# EAGLE board Week2ATTINY4-5-9-10 (EAGLE 8.4.3)
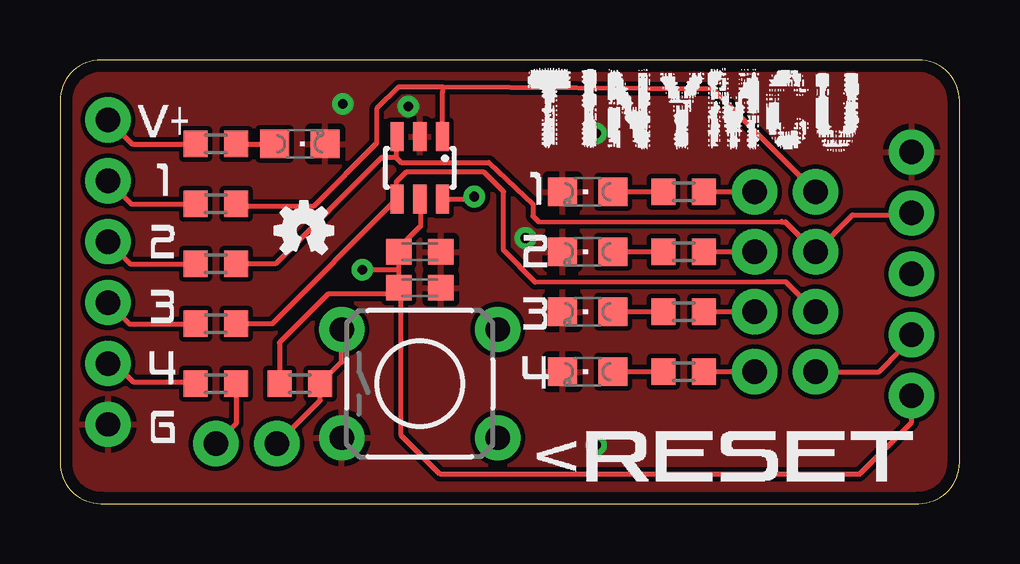
[diagram p0: board, top side]
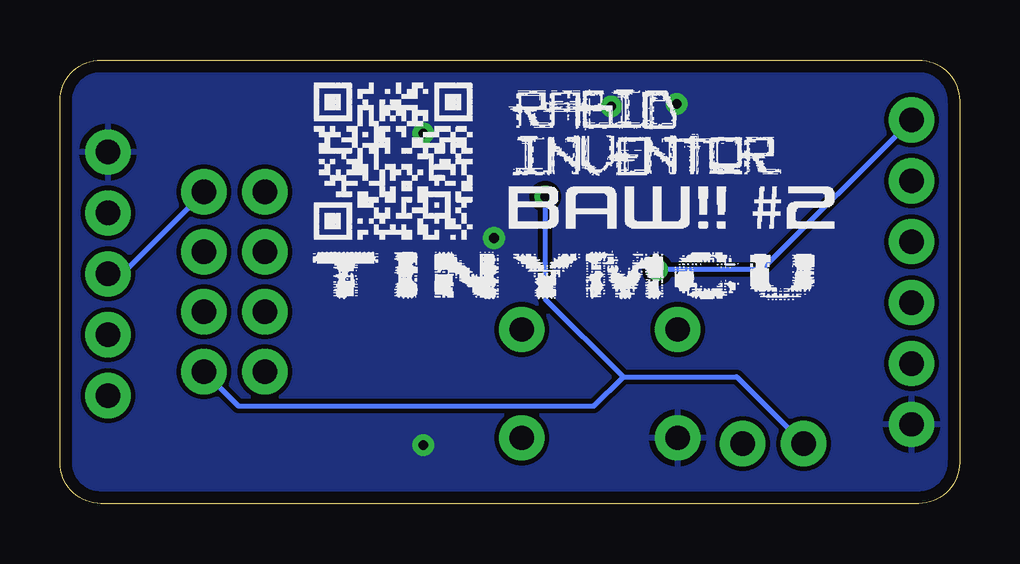
[diagram p1: board, bottom side, seen from below]

Size 37.5 x 18.5 mm. Coordinates in mm from the lower left corner, seen from the top.
Outline: 0,16.79 0,1.71 arc90 1.71,0 35.79,0 arc90 37.5,1.71 37.5,16.79 arc90 35.79,18.5 1.71,18.5 arc90 0,16.79
Copper layers (1*16): Top 0.035mm / dielectric 1.5mm / Bottom 0.035mm
Design rules "pimoroni": minimum track width 0.2mm, minimum drill 0.3mm, track to track 0.2mm, track to pad 0.2mm, pad to pad 0.2mm, via to via 0.2mm, smd to smd 0.15mm, copper to edge 0.5mm, drill to drill 0.15mm, minimum pad ring 0.3mm, minimum via ring 0.25mm, stop-mask expansion 0.05mm, vias tented up to drill 0.6mm, thermal gap 0.25mm

## Footprints (pad centres in the part's own frame; a part is rotated, then mirrored left to right if it is on the bottom)
C0603K = smd 1.05 x 1.08: 1 -0.875,0; 2 0.875,0
1X02_NO_SILK = drill 1.016 pad 1.88: 1 0,0; 2 2.54,0
1X06_NO_SILK = drill 1.016 pad 1.88: 1 0,0; 2 2.54,0; 3 5.08,0; 4 7.62,0; 5 10.16,0; 6 12.7,0
1X05_NO_SILK = drill 1.016 pad 1.88: 1 0,0; 2 2.54,0; 3 5.08,0; 4 7.62,0; 5 10.16,0
CHIPLED_0805 = smd 1.2 x 1.2: A 0,-1.05; C 0,1.05
SOT23-6AVR = smd 0.55 x 1.2: 1 0.95,1.3; 2 0,1.3; 3 -0.95,1.3; 4 -0.95,-1.3; 5 0,-1.3; 6 0.95,-1.3
R0603 = smd 1 x 1.1: 1 -0.85,0; 2 0.85,0
TACTILE_SWITCH_PTH_6.0MM = drill 1.016 pad 1.88: 1 -3.251,2.261; 2 3.251,2.261; 3 -3.251,-2.261; 4 3.251,-2.261

## Placement (x,y rotation side)
C1  100nF  [C0603K]  15,10.5 0 top
C2  1uF  [C0603K]  15,9 0 top
JP1  RESET_PULLUP_ENABLE  [1X02_NO_SILK]  6.5,2.5 0 top
JP2  LED_SEL_1  [1X02_NO_SILK]  31.5,13 180 top
JP3  LED_SEL_2  [1X02_NO_SILK]  31.5,10.5 180 top
JP4  LED_SEL_3  [1X02_NO_SILK]  31.5,8 180 top
JP5  LED_SEL_4  [1X02_NO_SILK]  31.5,5.5 180 top
JP6  IO Current Limited  [1X06_NO_SILK]  2,16 270 top
JP8  Programming Header  [1X05_NO_SILK]  35.5,4.5 90 top
LED1  Power  [CHIPLED_0805]  10,15 270 top
LED2  IO1  [CHIPLED_0805]  22,13 90 top
LED3  IO2  [CHIPLED_0805]  22,10.5 90 top
LED4  IO3  [CHIPLED_0805]  22,8 90 top
LED5  IO4  [CHIPLED_0805]  22,5.5 90 top
LOGO1  OSHW-LOGOMINI  [OSHW-LOGO-MINI]  10.17,11.4 0 top
MCU  ATTINY4/5/9/106ST1  [SOT23-6AVR]  15,14 0 top
R1  TBD  [R0603]  6.5,12.5 180 top
R2  TBD  [R0603]  6.5,10 180 top
R3  TBD  [R0603]  6.5,7.5 180 top
R4  TBD  [R0603]  6.5,5 180 top
R5  10k  [R0603]  10,5 180 top
R6  220R  [R0603]  6.5,15 180 top
R7  220R  [R0603]  26,13 0 top
R8  220R  [R0603]  26,10.5 0 top
R9  220R  [R0603]  26,8 0 top
R10  220R  [R0603]  26,5.5 0 top
S1  RESET  [TACTILE_SWITCH_PTH_6.0MM]  15,5 0 top

## Library data of the parts
C1 C2 R1-R10 = rcl
JP1-JP6 JP8 = SparkFun-Connectors
LED1-LED5 = led
LOGO1 = SparkFun-Aesthetics
MCU = eaglepartslib
S1 = SparkFun-Switches; PROD_ID: SWCH-08441; SF_SKU: COM-00097

## Nets
GND: C1.2 C2.2 JP6.6 JP8.5 LED1.C LED2.C LED3.C LED4.C LED5.C MCU.2 S1.3
IO1: JP6.2 R1.2
IO2: JP6.3 R2.2
IO3: JP6.4 R3.2
IO4: JP6.5 R4.2
IOLED1: JP2.2 R7.2
IOLED2: JP3.2 R8.2
IOLED3: JP4.2 R9.2
IOLED4: JP5.2 R10.2
N$1: LED1.A R6.1
N$2: LED2.A R7.1
N$3: LED3.A R8.1
N$4: LED4.A R9.1
N$5: LED5.A R10.1
PB0: JP2.1 JP8.3 MCU.1 R1.1
PB1: JP3.1 JP8.4 MCU.3 R2.1
PB2: JP4.1 MCU.4 R3.1
PB3/_RESET: JP1.1 JP5.1 JP8.2 MCU.6 R4.1
RESET_PULLUP: JP1.2 R5.1 S1.1
VCC: C1.1 C2.1 JP6.1 JP8.1 MCU.5 R5.2 R6.2

## Tracks (layer width: path | path; a pad name or v marks a point on that pad's centre or on a via)
GND  (via drill 0.4)
  other vias: 14.53,16.56 11.79,16.66 22.35,2.44 19.41,11.07 22.35,15.44
  pour Top: -1,-1 -1,21 39,21 39,-1
  pour Bottom: -2,-2 -2,21 41,21 41,-2
IO1
  Top 0.203: JP6.2 2.96,12.5 R1.2
IO2
  Top 0.203: JP6.3 2.92,10 R2.2
IO3
  Top 0.203: JP6.4 2.88,7.5 R3.2
IO4
  Top 0.203: JP6.5 2.29,5.84 3.05,5.08 5.57,5.08 R4.2
IOLED1
  Top 0.203: JP2.2 R7.2
IOLED2
  Top 0.203: JP3.2 R8.2
IOLED3
  Top 0.203: JP4.2 R9.2
IOLED4
  Top 0.203: JP5.2 R10.2
N$1
  Top 0.203: R6.1 LED1.A
N$2
  Top 0.203: R7.1 LED2.A
N$3
  Top 0.203: R8.1 LED3.A
N$4
  Top 0.203: R9.1 LED4.A
N$5
  Top 0.203: R10.1 LED5.A
PB0
  Top 0.203: MCU.1 15.95,17.17 15.95,17.37 | 15.95,17.37 14.12,17.37 13.21,16.46 13.21,15.04 10.57,12.39 7.46,12.39 R1.1 | JP2.1 27.23,17.27 15.95,17.37
  Bottom 0.203: JP2.1 35,9.5 35.08,9.58 JP8.3
PB1
  Top 0.203: MCU.3 14.02,15.27 14.02,14.43 | 14.02,14.43 13.41,14.43 8.98,10 R2.1 | 14.02,14.43 14.22,14.22 17.88,14.22 19.71,12.5 19.71,11.99 19.94,11.75 30.07,11.74 30.08,11.76 30.09,11.75 30.25,11.75 JP3.1 33.04,12.04 35.42,12.04 JP8.4
PB2
  Top 0.203: 14.02,12.67 MCU.4 | 14.02,12.67 8.85,7.5 R3.1 | JP4.1 30.25,9.25 29.48,9.25 29.45,9.24 19.81,9.22 18.49,10.57 18.49,13.01 17.68,13.82 14.43,13.82 14.02,13.41 14.02,12.67
PB3/_RESET  (via drill 0.4)
  Top 0.203: R4.1 7.35,3.35 JP1.1 | MCU.6 17.17,12.7 v17.27,12.8 | JP8.2 35.05,6.59 35.05,6.4 34.15,5.5 JP5.1
  Bottom 0.203: v17.27,12.8 17.27,8.53 14.02,5.28 | 14.02,5.28 9.28,5.28 JP1.1 | JP5.1 30.06,4.06 15.24,4.06 14.02,5.28
RESET_PULLUP
  Top 0.203: JP1.2 10.85,4.31 R5.1 11.75,5.9 S1.1
VCC  (via drill 0.4)
  Top 0.203: JP6.1 3,15 R6.2 | MCU.5 15.04,12.66 15.04,11.58 14.12,10.67 C1.1 14.12,9.75 | C2.1 14.12,9.75 | C2.1 13.86,8.74 11.18,8.74 9.15,6.71 R5.2 | v12.6,9.75 14.12,9.75 | C2.1 14.22,8.9 14.22,2.85 15.85,1.22 33.33,1.22 35.5,3.39 JP8.1
  Bottom 0.203: JP6.1 8.25,9.75 v12.6,9.75